# Altium PCB UM-1.PcbDoc
Units mm, origin at the board's own origin, x right, y up, seen from the top; angles counter-clockwise.
Board outline 22 x 12 mm, 4 copper layers (Top Layer, Layer 1, Layer 2, Bottom Layer), stack 0.793 mm thick; 23 components, 21 nets, 144 pads, 83 vias.
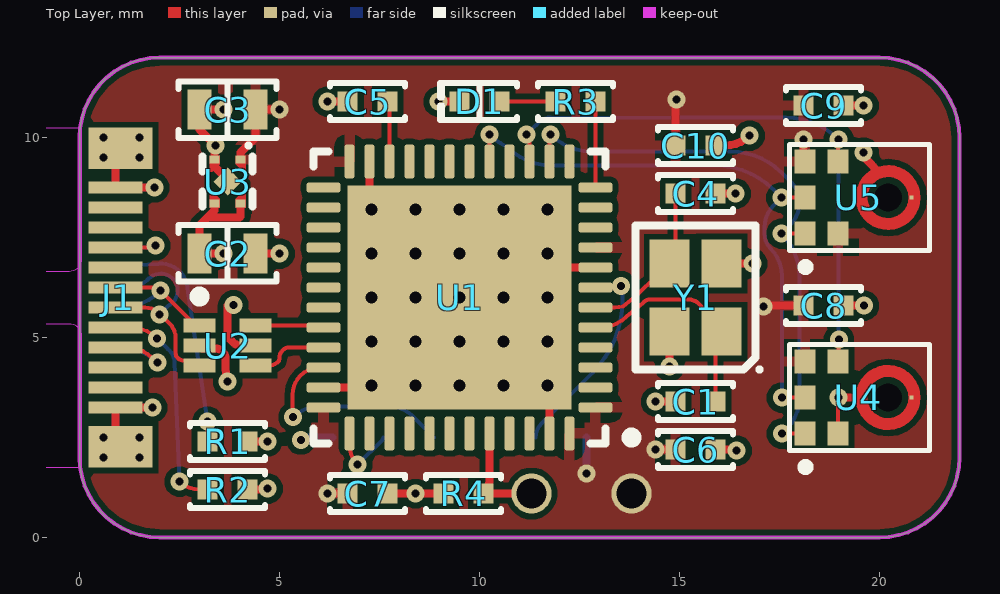
[diagram p0: Top Layer view]
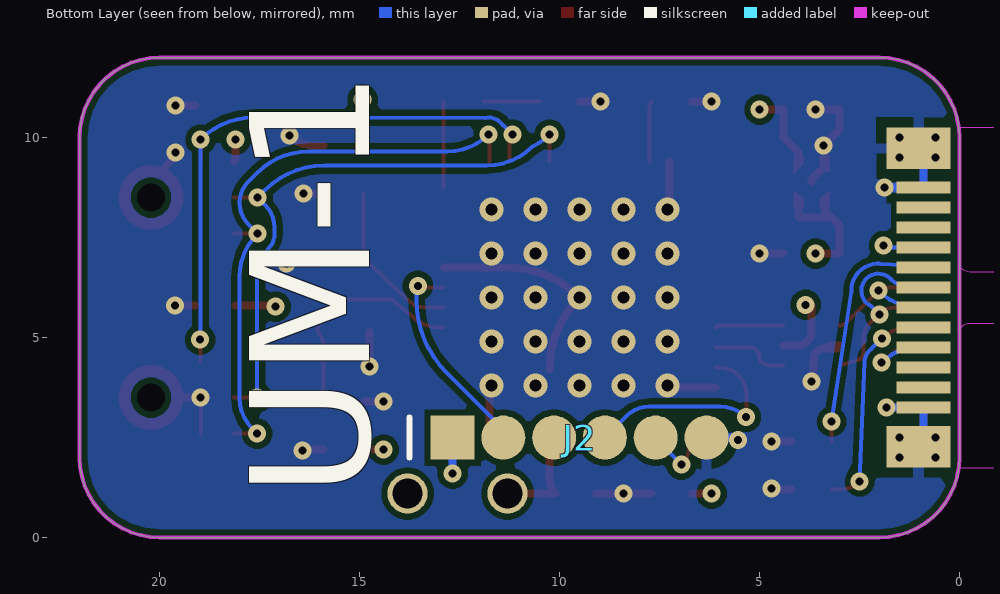
[diagram p1: Bottom Layer view, seen from below]
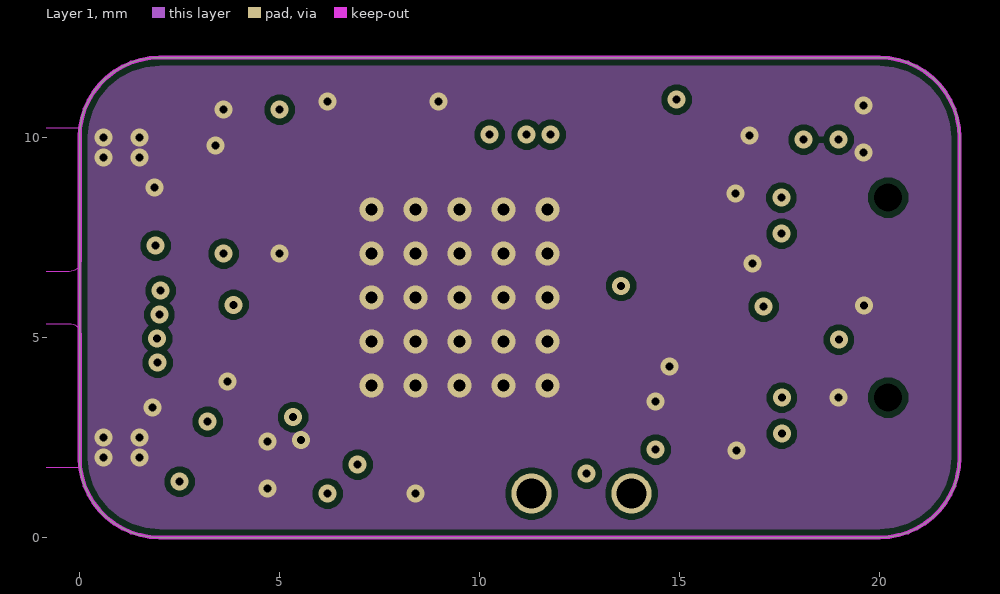
[diagram p2: Layer 1]
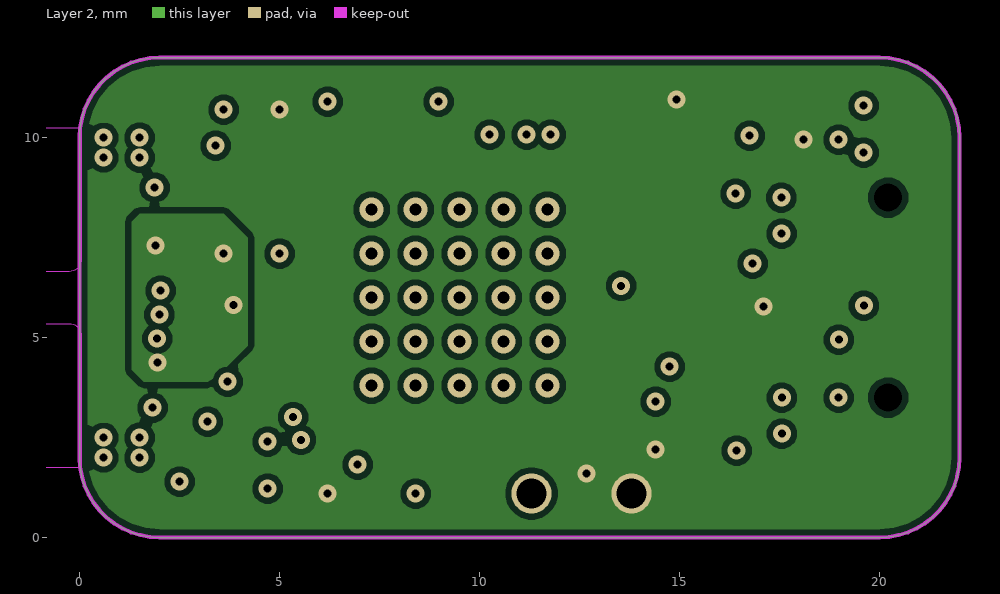
[diagram p3: Layer 2]

## Layer stack, top to bottom
Top Solder: solder mask 0.0102, Solder Resist, Dk 3.5
Top Layer: signal copper 0.0356
Dielectric 2: prepreg 0.0711, PP-006, Dk 4.1
Layer 1: signal copper 0.035
Dielectric 1: dielectric 0.51, FR-4, Dk 4.8
Layer 2: signal copper 0.035
Dielectric 3: prepreg 0.0711, PP-006, Dk 4.1
Bottom Layer: signal copper 0.0356
Bottom Solder: solder mask 0.0102, Solder Resist, Dk 3.5

## Board outline
2,0 20,0 ccw(c20,2) 22,2 22,10 ccw(c20,10) 20,12 2,12 ccw(c2,10) 0,10 0,2 ccw(c2,2)

## Design rules (kind name [scope] priority, off if disabled: settings)
Clearance [All] p1: gap=0.15 ignorepadtopadclearanceinfootprint=TRUE
MinimumSolderMaskSliver [All] p1 off: minsoldermaskwidth=0.1
PolygonConnect PolygonConnect_VIA [All vs IsVia] p1: connectstyle=Direct reliefconductorwidth=0.254 reliefentries=4 polygonreliefangle="90 Angle" airgapwidth=0.254
PolygonConnect [All] p2: connectstyle=Relief reliefconductorwidth=0.254 reliefentries=4 polygonreliefangle="90 Angle" airgapwidth=0.254
RoutingVias [All] p1: holewidth=0.3 width=0.6 viastyle="Through Hole" minholewidth=0.2 minwidth=0.45 maxholewidth=1 maxwidth=2
SilkToSilkClearance [All] p1 off: silktosilkclearance=0.254
SilkToSolderMaskClearance [IsPad] p1: minsilkscreentomaskgap=0.05 clearancetoexposedcopper=TRUE
SolderMaskExpansion [All] p1: expansion=0.05 istentingtop=FALSE
Width [All] p1: maxlimit=2 minlimit=0.1 preferedwidth=0.2
27 further rules are at their usual default settings.

## Components (designator, comment, footprint, x,y, rotation, side; value= is the part's Value field where it differs from the comment)
C1 "8pF" "CAP 0402/1005" 15.4,3.4 r0 top
C2 "10uF" "CAP 0603/1608" 3.7,7.1 r180 top
C3 "10uF" "CAP 0603/1608" 3.7,10.7 r0 top
C4 "8pF" "CAP 0402/1005" 15.4,8.6 r180 top
C5 "2.2uF" "CAP 0402/1005" 7.2,10.9 r0 top
C6 "100nF" "CAP 0402/1005" 15.4,2.2 r180 top
C7 "100nF" "CAP 0402/1005" 7.2,1.1 r180 top
C8 "100nF" "CAP 0402/1005" 18.6,5.8 r180 top
C9 "100nF" "CAP 0402/1005" 18.6,10.8 r180 top
C10 "100nF" "CAP 0402/1005" 15.4,9.8 r180 top
D1 "Green" "LED 0402/1005 GREEN" 10,10.9 r180 top
J1 "USB 3.1 Type C Plug" 632712000112 -4.75,6 r270 top
J2 "SWD Port" "DBG_6PX127 SMD" 9.5,2.5 r180 bottom
R1 "5.1K" "RES 0402/1005" 3.7,2.4 r180 top
R2 "5.1K" "RES 0402/1005" 3.7,1.2 r180 top
R3 "5.1K" "RES 0402/1005" 12.4,10.9 r180 top
R4 "10K" "RES 0402/1005" 9.6,1.1 r180 top
U1 "STM32F411CEU6" QFN50P700X700X60_HS-49N 9.5,6 r180 top
U2 "USBLC6-2P6" SOTFL50P160X60-6N 3.7,4.8 r0 top
U3 "LDLN025PU33R" XDFN65P100X45-4N 3.7,8.9 r180 top
U4 "ICS-43434" "TDK ICS-43434"#1 19.5,3.5 r90 top
U5 "ICS-43434" "TDK ICS-43434"#2 19.5,8.5 r90 top
Y1 "12MHz" "NDK NZ2520SD" 15.4,6 r90 top

## Footprints (in the part's own frame and the unit in brackets; to place one, negate y for a bottom-side part, rotate by r counter-clockwise, add the part's x,y. Pads: shape width x height; smd on the part's side, far side on the other; paste and mask are expansions set on the pad)
632712000112 [mm] "USB_ Type C 3.1 Plug_Horizontal_SMT_0,8mm"
  rect 0.3x1.35 smd: A1(2.75,5.65) A2(2.25,5.65) A3(1.75,5.65) A4(1.25,5.65) A5(0.75,5.65) A6(0.25,5.65) A7(-0.25,5.65) A8(-0.75,5.65) A9(-1.25,5.65) A10(-1.75,5.65) A11(-2.25,5.65) A12(-2.75,5.65)
  rect 0.3x1.35 smd far side: B1(-2.75,5.65) B2(-2.25,5.65) B3(-1.75,5.65) B4(-1.25,5.65) B5(-0.75,5.65) B6(-0.25,5.65) B7(0.25,5.65) B8(0.75,5.65) B9(1.25,5.65) B10(1.75,5.65) B11(2.25,5.65) B12(2.75,5.65)
  rect 1.04x1.6 smd: S(-3.73,5.775) S(3.73,5.775)
  rect 1.04x1.6 smd far side: S(-3.73,5.775) S(3.73,5.775)
  Keep-Out Layer board cut-out: 0.65,3.595 0.65,4.495 0.673,4.61 0.738,4.707 0.835,4.772 0.95,4.795 0.95,4.795 4.25,4.795 4.25,3.595
  Keep-Out Layer board cut-out: -4.25,3.595 -4.25,4.795 -0.95,4.795 -0.835,4.772 -0.738,4.707 -0.673,4.61 -0.65,4.495 -0.65,4.495 -0.65,3.595
  body extent -4.21,-5.83 4.22,6.17, height 1.51
"CAP 0402/1005" [mm] "Chip Capacitor, 2-Leads, Body 1.02x0.51mm, IPC Medium Density"
  rect 0.5x0.5 smd: 1(-0.5,0) 2(0.5,0)
  silkscreen extent -0.94,-0.46 0.94,0.46, body extent -0.5,-0.26 0.5,0.26, height 0.52
"CAP 0603/1608" [mm] "Chip Capacitor, 2-Leads, Body 1.60x0.80mm, IPC Medium Density"
  rect 0.6x1 smd: 1(-0.7,0) 2(0.7,0)
  silkscreen extent -1.22,-0.71 1.22,0.7, body extent -0.8,-0.41 0.8,0.41, height 0.82
"DBG_6PX127 SMD" [mm]
  rect 1.1x1.1 smd paste-2 mask+0: 1(-3.175,0)
  round 1.1 smd paste-2 mask+0: 2(-1.905,0) 3(-0.635,0) 4(0.635,0) 5(1.905,0) 6(3.175,0)
  silkscreen extent -4.25,-0.5 -4.25,0.5
"LED 0402/1005 GREEN" [mm] "Chip Diode, 2-Leads, Body 1.00x0.50mm, IPC Medium Density"
  rect 0.5x0.5 smd: 1(-0.5,0) 2(0.5,0)
  silkscreen extent -0.94,-0.46 0.99,0.46, body extent -0.5,-0.25 0.5,0.25, height 0.21
"NDK NZ2520SD" [mm] "Crystal, 4-Leads, Body 2.00x2.50mm, Pitch 1.70mm, IPC Medium Density"
  rect 1.2x1 smd: 1(-0.85,-0.65) 2(0.85,-0.65) 3(0.85,0.65) 4(-0.85,0.65)
  silkscreen extent -1.85,-1.65 1.8,1.5, body extent -1.27,-1.02 1.28,1.03, height 1
QFN50P700X700X60_HS-49N [mm] "QFN, 48-Leads, Body 7.00x7.00mm, Pitch 0.50mm, Thermal Pad 5.60x5.60mm, IPC Medium Density"
  rrect50% 0.85x0.25 smd mask+0.05: 1(-3.4,2.75) 2(-3.4,2.25) 3(-3.4,1.75) 4(-3.4,1.25) 5(-3.4,0.75) 6(-3.4,0.25) 7(-3.4,-0.25) 8(-3.4,-0.75) 9(-3.4,-1.25) 10(-3.4,-1.75) 11(-3.4,-2.25) 12(-3.4,-2.75) 25(3.4,-2.75) 26(3.4,-2.25) 27(3.4,-1.75) 28(3.4,-1.25) 29(3.4,-0.75) 30(3.4,-0.25) 31(3.4,0.25) 32(3.4,0.75) 33(3.4,1.25) 34(3.4,1.75) 35(3.4,2.25) 36(3.4,2.75)
  rrect50% 0.25x0.85 smd mask+0.05: 13(-2.75,-3.4) 14(-2.25,-3.4) 15(-1.75,-3.4) 16(-1.25,-3.4) 17(-0.75,-3.4) 18(-0.25,-3.4) 19(0.25,-3.4) 20(0.75,-3.4) 21(1.25,-3.4) 22(1.75,-3.4) 23(2.25,-3.4) 24(2.75,-3.4) 37(2.75,3.4) 38(2.25,3.4) 39(1.75,3.4) 40(1.25,3.4) 41(0.75,3.4) 42(0.25,3.4) 43(-0.25,3.4) 44(-0.75,3.4) 45(-1.25,3.4) 46(-1.75,3.4) 47(-2.25,3.4) 48(-2.75,3.4)
  rect 5.6x5.6 smd mask+0.05: 49(0,0)
  silkscreen extent -4.43,-3.65 3.65,3.65, body extent -3.52,-3.52 3.52,3.52, height 0.6
"RES 0402/1005" [mm] "Chip Resistor, 2-Leads, Body 1.0x0.5mm, IPC Medium Density"
  rect 0.5x0.5 smd: 1(-0.5,0) 2(0.5,0)
  silkscreen extent -0.94,-0.46 0.94,0.46, body extent -0.5,-0.25 0.5,0.25, height 0.35
SOTFL50P160X60-6N [mm] "SOTFL, 6-Leads, Body 1.60x1.60mm, Pitch 0.50mm, IPC Medium Density"
  rect 0.8x0.35 smd: 1(-0.7,0.5) 2(-0.7,0) 3(-0.7,-0.5) 4(0.7,-0.5) 5(0.7,0) 6(0.7,0.5)
  silkscreen extent -0.82,1.1 -0.57,1.35, body extent -0.8,-0.85 0.8,0.85, height 0.6
"TDK ICS-43434"#1 [mm] "MEMS Microphone"
  rect 0.6x0.522 smd paste-0.05: 1(-0.9,1.361) 2(-0.9,0.539) 4(0.9,0.539) 5(0.9,1.361) 6(0,1.361)
  rect 0.1x0.1 smd paste-1 mask+0: 3(0,-1.3)
  round 0.5 hole 0.7 unplated mask+0.665: ""(0,-0.713)
  Top Layer circle w0.3: c0,-0.713 r0.663
  silkscreen extent -1.84,-1.75 1.33,1.75, body extent -1.33,-1.75 1.33,1.75, height 0.98
"TDK ICS-43434"#2 [mm] "MEMS Microphone"
  rect 0.6x0.522 smd paste-0.05: 1(-0.9,1.361) 2(-0.9,0.539) 4(0.9,0.539) 5(0.9,1.361) 6(0,1.361)
  rect 0.1x0.1 smd paste-1 mask+0: 3(0,-1.3)
  round 0.5 hole 0.7 unplated mask+0.665: ""(0,-0.713)
  Top Layer lines w0.3: 0.55,-0.344 ccw(c0,-0.713) 0,-1.376 ccw(c0,-0.713) 0.587,-0.406 ccw(c0,-0.713) 0.55,-0.344
  silkscreen extent -1.84,-1.75 1.33,1.75, body extent -1.33,-1.75 1.33,1.75, height 0.98
XDFN65P100X45-4N [mm] "XDFN, 4-Leads, Body 1.00x1.00mm, Pitch 0.65mm, IPC Medium Density"
  rect 0.25x0.2 smd mask+0: 1(-0.325,-0.55) 2(0.325,-0.55) 3(0.325,0.55) 4(-0.325,0.55)
  rect 0.5x0.5 smd rot 45 mask+0.05: 5(0,0)
  Top Layer region: -0.45,0.65 -0.45,0.25 -0.38,0.25 -0.2,0.43 -0.2,0.65
  Top Layer region: 0.45,0.65 0.45,0.25 0.38,0.25 0.2,0.43 0.2,0.65
  Top Layer region: 0.45,-0.65 0.45,-0.25 0.38,-0.25 0.2,-0.43 0.2,-0.65
  Top Layer region: -0.45,-0.65 -0.45,-0.18 -0.2,-0.43 -0.2,-0.65
  silkscreen extent -0.63,-0.95 0.63,0.63, body extent -0.5,-0.5 0.5,0.5, height 0.45

## Part data
C1 C4: library part CM0143, "CAP CER 8PF 50V NP0 0402", Device Package="0402 (1005 Metric)", Manufacturer=Murata, Part Number=GRM1555C1H8R0BA01D, Supplier Part Number 1=490-8230-2-ND, TemperatureCoefficient="C0G, NP0", TemperatureRange="-55C ~ 125C", Tolerance=0.1pF, Voltage=50V, ComponentLink1Description=Datasheet, ComponentLink1URL=http://www.murata.com/~/media/webrenewal/support/library/catalog/products/capacitor/mlcc/c02e.ashx, ComponentLink2Description="Digi-Key listing", ComponentLink2URL=http://digikey.com/product-detail/en/GRM1555C1H8R0BA01D/490-8230-2-ND/3694033, PartId=CM0143, Price=0.0108, Supplier 1=Digi-Key, Type=-
C2 C3: library part CM0905, "CAP CER 10UF 25V X5R 0603", Device Package="0603 (1608 Metric)", Manufacturer=Murata, Part Number=GRM188R61E106MA73D, Supplier Part Number 1=490-7202-2-ND, TemperatureCoefficient=X5R, TemperatureRange="-55C ~ 85C", Tolerance=20%, Voltage=25V, ComponentLink1Description=Datasheet, ComponentLink1URL=http://www.murata.com/~/media/webrenewal/support/library/catalog/products/capacitor/mlcc/c02e.pdf, ComponentLink2Description="Digi-Key Listing", ComponentLink2URL=https://www.digikey.com/product-detail/en/murata-electronics-north-america/GRM188R61E106MA73D/490-7202-2-ND/3900497, PartId=CM0905, Price=0.0858, Supplier 1=Digi-Key
C5: library part CM0503, "CAP CER 2.2UF 10V X5R 0402", Device Package="0402 (1005 Metric)", Manufacturer="Murata Electronics North America", Part Number=GRM155R61A225ME95D, Supplier Part Number 1=490-10452-2-ND, TemperatureCoefficient=X5R, TemperatureRange="-55C ~ 85C", Tolerance=20%, Voltage=10V, ComponentLink1Description=Datasheet, ComponentLink1URL=http://www.murata.com/~/media/webrenewal/support/library/catalog/products/capacitor/mlcc/c02e.pdf, ComponentLink2Description="Digi-Key Listing", ComponentLink2URL=https://www.digikey.com/product-detail/en/murata-electronics-north-america/GRM155R61A225ME95D/490-10452-2-ND/5027537, PartId=CM0503, Price=0.0151, Supplier 1=Digi-Key, va=2200000
C6 C7 C8 C9 C10: library part CM0464, "CAP CER 100NF 25V X5R 0402", Device Package="0402 (1005 Metric)", Manufacturer=Murata, Part Number=GRM155R61E104KA87D, Supplier Part Number 1=490-5920-2-ND, TemperatureCoefficient=X5R, TemperatureRange="-55C ~ 85C", Tolerance=10%, Voltage=25V, ComponentLink1Description=Datasheet, ComponentLink1URL=http://www.murata.com/~/media/webrenewal/support/library/catalog/products/capacitor/mlcc/c02e.pdf, ComponentLink2Description="Digi-Key Listing", ComponentLink2URL=https://www.digikey.com/product-detail/en/murata-electronics-north-america/GRM155R61E104KA87D/490-5920-2-ND/3693681, PartId=CM0464, Price=0.0048, Supplier 1=Digi-Key
D1: library part LS0063, "LED GREEN DIFFUSED 0402 SMD", Current (Test)=20mA, Device Package="0402 (1005 Metric)", Manufacturer="Avago Technologies US Inc.", Part Number=HSMG-C280, Supplier Part Number 1=516-3066-2-ND, Voltage Forward=2.2V, Colour=Green, ComponentLink1Description=Datasheet, ComponentLink1URL=http://www.avagotech.com/docs/AV02-0602EN, ComponentLink2Description="Digi-Key Listing", ComponentLink2URL=http://www.digikey.ca/product-detail/en/HSMG-C280/516-3066-2-ND/1235358, Lens Transparency=Diffused, Millicandela=15mcd, PartId=LS0063, Price=0.1147, Supplier 1=Digi-Key, Type="Surface Mount", Viewing Angle=130
J1: library part CU0054, "USB 3.1 Type C, Plug, Horizontal, SMT", Manufacturer=Wurth, Part Number=632712000112, Supplier Part Number 1=710-632712000112, ComponentLink1Description=Datasheet, ComponentLink1URL=https://katalog.we-online.com/em/datasheet/632712000112.pdf, Number Of Positions=24, PartId=CU0054, Supplier 1=Mouser, Type="USB - C"
J2: "6 Pin SWD Connector", Component Type="Standard (No BOM)", Part Number="SWD Port", Pin Count=6
R1 R2 R3: library part RC1489, "RES SMD 5.1K OHM 5% 1/16W 0402", Device Package="0402 (1005 Metric)", Manufacturer=Yageo, Part Number=RC0402JR-075K1L, PowerRating="0.0625W, 1/16W", Supplier Part Number 1=603-RC0402JR-075K1L, TemperatureCoefficient=100ppm/C, TemperatureRange="-55C ~ 155C", Tolerance=5%, ComponentLink1Description=Datasheet, ComponentLink1URL=http://www.yageo.com/NewPortal/yageodocoutput?fileName=/pdf/R-Chip/PYu-RC_Group_51_RoHS_L_9.pdf, PartId=RC1489, Price=0.0043, Supplier 1=Mouser, Type="Thick Film"
R4: library part RC1530, "RES SMD 10K OHM 5% 1/16W 0402", Device Package="0402 (1005 Metric)", Manufacturer=Yageo, Part Number=RC0402JR-0710KL, PowerRating="0.0625W, 1/16W", Supplier Part Number 1=603-RC0402JR-0710KL, TemperatureCoefficient=100ppm/C, TemperatureRange="-55C ~ 155C", Tolerance=5%, ComponentLink1Description=Datasheet, ComponentLink1URL=http://www.yageo.com/NewPortal/yageodocoutput?fileName=/pdf/R-Chip/PYu-RC_Group_51_RoHS_L_9.pdf, PartId=RC1530, Price=0.0043, Supplier 1=Mouser, Type="Thick Film"
U1: library part US3028, "32-bit MCU, 512KB Flash, 128KB RAM, USB", Device Package="48-QFN (7x7)", Manufacturer=ST, Operating Temperature="-40C ~ 85C", Supplier Part Number 1="497-14907-ND / 497-14907-ND / 497-14907-ND", ComponentLink1Description=Datasheet, ComponentLink1URL=https://www.st.com/resource/en/datasheet/stm32f411ce.pdf, Part Number=STM32F411CEU6, PartId=US3028, Price=4, Supplier 1=Digi-Key, Supplier 2=Mouser, Supplier Part Number 2=511-STM32F411CEU6, Type=MCU
U2: library part IIF001, "TVS ARRAY SOT666", Device Package=SOTFL-6, Manufacturer=ST, Operating Temperature="-40C ~ 125C", Supplier Part Number 1=497-5026-1-ND, ComponentLink1Description=Datasheet, ComponentLink1URL=http://www.st.com/resource/en/datasheet/usblc6-2.pdf, Part Number=USBLC6-2P6, PartId=IIF001, Price=0.58, Supplier 1=Digi-Key, Supplier 2=Farnell, Supplier Part Number 2=1295310, Type="ESD Diode"
U3: library part URL069, "3.3V 250mA Ultra Low Noise LDO", Device Package=4-XDFN, Input Voltage MAX=5.5V, Manufacturer=ST, Operating Temperature="-40C ~ 125C", Output Current=250mA, Output Voltage=3.3V, Supplier Part Number 1=497-17003-2-ND, Alt Part=NCP161BMX330TBG, ComponentLink1Description=Datasheet, ComponentLink1URL=http://www.st.com/resource/en/datasheet/ldln025.pdf, Part Number=LDLN025PU33R, PartId=URL069, Price=0.2295, Supplier 1=Digi-Key, Supplier 2=Mouser, Supplier Part Number 2=511-LDLN025PU33R, Type=LDO
U4 U5: library part UA0012, "MICROPHONE MEMS DIGITAL I2S OMNI", Manufacturer=TDK, Operating Temperature="-40C ~ 85C", Package=None, Supplier Part Number 1=1428-1066-2-ND, Availability=Unavailable, ComponentLink1Description=Datasheet, ComponentLink1URL=https://invensense.tdk.com/wp-content/uploads/2016/02/DS-000069-ICS-43434-v1.2.pdf, MP=ICS-43434, Part Number=ICS-43434, PartId=UA0012, Price=2, Supplier 1=Digi-Key, Supplier 2=Mouser, Supplier Part Number 2=410-ICS-43434, Type="MEMS MIC"
Y1: library part OC0706, "CRYSTAL 12MHZ 12PF SMD", Device Package="4-SMD, No Lead (DFN, LCC", Frequency Stability=-, Frequency Tolerance=10ppm, Load Capacitance=12pF, Manufacturer=ECS, Part Number=ECS-120-12-36Q-CWY-TR, Supplier Part Number 1=XC2419CT-ND, ComponentLink1Description=Datasheet, ComponentLink1URL=https://ecsxtal.com/store/pdf/ECX-2236Q.pdf, Frequency=12MHz, PartId=OC0706, Series=ECX-2236Q, Supplier 1=Digi-Key, Supplier 2=Mouser, Supplier Part Number 2=520-120-12-36Q-CWYT, Type="MHz Crystal"

## Free pads (board coordinates)
  round 1 hole 0.75: P2(11.3,1.1) P3(13.8,1.1)

## Via types
v1: diameter 0.45, hole 0.2, Top Layer to Bottom Layer, tented both sides, 58 vias
v2: diameter 0.6, hole 0.3, Top Layer to Bottom Layer, 25 vias

## Nets (pads, with @x,y where several pads share a name; then routed paths per layer and width w, separated by ;. In a path a pad name is that pad's centre, name@x,y a point inside that pad or via, vN(x,y) a via of type N, cw(c..) or ccw(c..) an arc to the next point about the centre after c; other vN are vias at no path point)
3.3V: C3.2 C6.2 C7.2 C8.2 C9.2 C10.2 J2.1 pad.P3 U1.1 U1.9 U1.24 U1.36 U1.48 U3.1 U4.5 U5.2 U5.5 | length 6.6
  Top Layer w0.2: U3.1 4.025,9.625 4.4,10 C3.2 v1(5,10.7) ; v1(6.2,1.1) C7.2 ; v1(14.4,2.2) C6.2 ; C10.2 14.9,10.89 cw(c14.985,10.89) v1(14.925,10.95) ; v1(17.1,5.775) cw(c17.16,5.715) 17.16,5.8 C8.2 ; v1(18.1,9.95) 18.1,9.494 ccw(c18.233,9.494) U5.5
  Bottom Layer w0.2: v1(12.675,1.6) J2.1
5V: C2.2 J1.A4 J1.A9 J1.B4 J1.B9 U2.5 U3.3 U3.4 | length 9.9
  Top Layer w0.1: J1.A4 J1.A4@1.197,4.75 ; J1.A9 1.779,7.25 ccw(c1.779,7.421) v1(1.9,7.3) v1@1.8,7.4 ; J1.A4@1.357,4.75 J1.A4@1.197,4.75 ; v1(1.951,4.374) 1.951,4.4 1.85,4.5 1.8,4.5 ccw(c1.197,3.897) J1.A4@1.197,4.75
  Top Layer w0.2: U3.3 3.375,8.175 3.2,8 ; v1(3.6,7.1) C2.2 3,7.8 3.2,8 ; v1(3.85,5.819) 3.831,5.8 3.7,5.8 3.7,5.141 ccw(c4.041,5.141) 3.751,4.962 cw(c3.4,4.475) 3.873,4.845 ccw(c4.041,5.141) 4.041,4.8 U2.5 ; U3.4 4.025,8.025 4,8 3.2,8
  Bottom Layer w0.1: J1.B9 J1.B9@1.042,4.75 ; J1.B4 1.78,7.25 ccw(c1.78,7.42) v1(1.9,7.3) v1@1.825,7.375 ; v1@1.858,4.4 v1@1.924,4.4 ; v1@1.951,4.4 v1(1.951,4.374) ccw(c1.042,3.466) v1@1.924,4.4 ; v1@1.95,4.4 v1@1.924,4.4 ; J1.B9@1.042,4.75 cw(c1.042,3.466) J1.B9@1.204,4.74 ; J1.B9@1.042,4.75 1.204,4.75 J1.B9@1.204,4.74 ; J1.B9@1.204,4.74 cw(c1.042,3.466) 1.645,4.6 cw(c1.042,3.466) 1.674,4.584 cw(c1.042,3.466) v1@1.924,4.4
BOOT: pad.P2 R4.1 U1.44 | length 2.7
  Top Layer w0.2: U1.44 10.25,1.462 cw(c9.738,1.462) R4.1 pad.P2
DATA: U1.17 U4.6 U5.6 | length 14.9
  Top Layer w0.1: U1.17 v1(10.25,10.075) ; v1(17.548,8.499) 17.55,8.5 U5.6 ; v1(17.561,3.5) U4.6@18.15,3.5
  Bottom Layer w0.1: v1(10.25,10.075) ccw(c11.336,11.161) 10.676,9.774 ccw(c11.822,10.922) 11.822,9.3 15.875,9.3 cw(c15.875,7.194) 17.364,8.683 v1(17.548,8.499) 17.355,8.305 ccw(c17.91,7.75) 17.125,7.75 17.125,7.587 ccw(c17.637,7.587) 17.275,7.225 cw(c16.585,6.535) 17.561,6.535 v1(17.561,3.5)
DN1: J1.A7 J1.B7 U2.1 | length 3.8
  Top Layer w0.1: J1.A7 1.95,6.25 v1(2.029,6.171) 2.282,5.918 cw(c2,5.6) 2.318,5.882 2.829,5.371 ccw(c3,5.542) U2.1
  Bottom Layer w0.1: J1.B7 1.015,5.75 ccw(c1.015,7.185) v1(2.029,6.171) 2,6.2 v1@1.961,6.2
DN2: U1.32 U2.6 | length 1.7
  Top Layer w0.1: U2.6 5.979,5.3 cw(c5.979,5.129) U1.32
DP1: J1.A6 J1.B6 U2.3 | length 5.7
  Top Layer w0.1: J1.A6 1.638,5.75 cw(c1.638,5.238) 2,5.6 v1@2.014,5.586 ; v1(1.999,5.571) v1@2.014,5.586 ; U2.3 2.569,4.427 cw(c2.6,4.625) 2.407,4.574 cw(c2.6,4.625) 2.4,4.625 2.4,4.634 cw(c2.741,4.641) 2.4,4.641 2.4,5 ccw(c1.917,5) 2.259,5.341 v1@2.014,5.586
  Bottom Layer w0.1: J1.B6 1.196,6.25 ccw(c1.196,7.002) 1.704,6.447 ccw(c1.575,6.6) 1.718,6.46 cw(c2.029,6.171) 1.728,6.47 cw(c2.029,6.171) 1.73,6.472 cw(c2.029,6.171) 1.84,6.551 cw(c2.029,6.171) 2.119,6.586 cw(c2.029,6.171) 2.43,6.313 cw(c2.029,6.171) 2.453,6.141 cw(c2.029,6.171) 2.217,5.789 ccw(c2.5,5.483) 2.205,5.778 v1(1.999,5.571)
DP2: U1.33 U2.4 | length 1.9
  Top Layer w0.1: U2.4 4.722,4.3 ccw(c4.722,4.667) 4.982,4.408 ccw(c4.759,4.5) 5,4.5 cw(c5.241,4.5) 5.071,4.671 5.1,4.7 cw(c5.221,4.579) 5.221,4.75 U1.33
GND: C1.1 C2.1 C3.1 C4.1 C5.1 C6.1 C7.1 C8.1 C9.1 C10.1 D1.2 J1.A1 J1.A12 J1.B1 J1.B12 J1.S J2.6 R1.1 R2.1 R4.2 U1.8 U1.23 U1.35 U1.47 U1.49 U2.2 U3.2 U3.5 U4.2 U4.3 U5.3 Y1.2 Y1.4 | length 33.8
  Top Layer w0.1: U4.2 18.961,3.486 v1(18.975,3.5)
  Top Layer w0.2: J1.S@1.025,2.27 cw(c1.326,2.571) 0.9,2.571 J1.A1 v1(1.825,3.25) ; J1.S@1.025,9.73 ccw(c1.326,9.429) 0.9,9.429 J1.A12 v1(1.875,8.75) ; v1(3.6,10.7) C3.1 3,10.2 v1(3.4,9.8) 3.375,9.775 U3.2 3.375,9.275 3.7,8.95 U3.5 ; v1@3.7,4 v1(3.7,3.9) 3.65,4.2 3.65,4.475 ccw(c3.4,4.475) 3.4,4.725 U2.2@3.372,4.725 ; R2.1 4.675,1.2 v1(4.7,1.225) ; R1.1 v1(4.7,2.4) ; C2.1 v1(5,7.1) ; U1.35 7.179,3.75 ccw(c7.179,3.921) v2(7.3,3.8) ; v1(6.2,10.9) C5.1 ; U1.23 7.25,8.321 ccw(c7.421,8.321) v2(7.3,8.2) ; C7.1 v1(8.4,1.1) R4.2 ; v1(8.975,10.9) D1.2 ; U1.49@10.25,4.198 ccw(c7.71,4.198) 9.506,5.994 v2(9.5,6) 9.506,6.006 cw(c11.302,4.21) 11.302,6.75 U1.8 ; v2(11.7,3.8) cw(c11.579,3.679) 11.75,3.679 U1.47 ; v1(14.4,3.4) C1.1 ; v1(14.75,4.275) Y1.4 ; C6.1 16.4,2.2 v1(16.425,2.175) ; C4.1 v1(16.4,8.6) ; C10.1 16.146,9.8 ccw(c16.146,10.654) v1(16.75,10.05) ; Y1.2 v1(16.825,6.85) ; v1(18.975,3.5) 19.5,3.5 ; C9.1 v1(19.6,10.8) ; C8.1@19.111,5.8 v1(19.611,5.8) ; v1(19.6,9.625) 19.6,9.525 19.812,9.313 cw(c19.586,9.087) 19.906,9.087 ; U2.2@3.372,4.725 ccw(c3.158,4.458) 3.158,4.8 U2.2 3.075,4.725 U2.2@3.372,4.725
  Top Layer w0.3: 19.798,9.004 19.844,9.05 19.85,9.056
  Bottom Layer w0.2: J1.S@1.025,2.27 cw(c1.326,2.571) 0.9,2.571 J1.B12 v1(1.825,3.25) ; J1.S@1.025,9.73 ccw(c1.326,9.429) 0.9,9.429 J1.B1 v1@1.875,8.75 ; v1(5.537,2.441) 5.525,2.475 cw(c5.585,2.415) 5.585,2.5 J2.6
  other v1: 0.6,2 1.5,2 0.6,2.5 1.5,2.5 0.6,9.5 1.5,9.5 0.6,10 1.5,10
  other v2: 8.4,3.8 9.5,3.8 10.6,3.8 7.3,4.9 8.4,4.9 9.5,4.9 10.6,4.9 11.7,4.9 7.3,6 8.4,6 10.6,6 11.7,6 7.3,7.1 8.4,7.1 9.5,7.1 10.6,7.1 11.7,7.1 8.4,8.2 9.5,8.2 10.6,8.2 11.7,8.2
LRCK: U1.14 U4.1 U5.1 | length 15
  Top Layer w0.1: U1.14 11.75,10.015 cw(c11.835,10.015) v1(11.775,10.075) ; v1(17.55,7.6) U5.1 ; v1(17.561,2.6) U4.1@18.15,2.6
  Bottom Layer w0.1: v1(11.775,10.075) ccw(c12.801,11.101) 12.801,9.65 16.275,9.65 cw(c16.275,7.839) 17.555,9.12 17.788,8.887 cw(c17.276,8.375) 18,8.375 cw(c17.215,8.375) 17.77,7.82 v1(17.55,7.6) cw(c16.464,6.514) 18,6.514 18,3.5 cw(c16.887,3.5) v1@17.674,2.713 ; v1(17.561,2.6) v1@17.674,2.713
NetC1_2: C1.2 U1.5 Y1.1 | length 5.5
  Top Layer w0.1: U1.5 13.011,5.25 ccw(c13.011,6.189) 13.675,5.525 14.086,5.864 cw(c14.25,5.75) 14.161,5.929 cw(c14.25,5.75) 14.25,5.95 15.25,5.95 cw(c15.25,5.75) 15.349,5.924 cw(c15.329,5.754) 15.45,5.875 15.962,5.363 cw(c15.748,5.15) Y1.1 ccw(c16.412,4.788) 15.9,4.788 C1.2
NetC4_2: C4.2 U1.6 Y1.3 | length 4.1
  Top Layer w0.1: U1.6 13.371,5.75 ccw(c13.371,6.604) 13.589,5.778 13.905,6.039 cw(c14.25,5.75) 13.972,6.104 13.982,6.114 ; 13.983,6.114 Y1.3 14.9,7 C4.2
NetC5_2: C5.2 U1.22 | length 1.5
  Top Layer w0.1: C5.2 cw(c7.579,10.779) 7.75,10.779 U1.22
NetD1_1: D1.1 R3.2 | length 1.4
  Top Layer w0.1: D1.1 R3.2
NetJ1_A5: J1.A5 R2.2 | length 5.6
  Top Layer w0.1: J1.A5 1.277,5.25 cw(c1.277,4.308) 1.916,5 cw(c1.277,4.308) v1(1.943,4.974) ; v1(2.5,1.4) ccw(c2.983,1.883) 2.983,1.2 R2.2
  Bottom Layer w0.1: v1(1.943,4.974) 2.196,4.721 cw(c1.951,4.374) 2.376,4.378 v1(2.5,1.4)
NetJ1_B5: J1.B5 R1.2 | length 6
  Top Layer w0.1: R1.2 v1(3.2,2.9)
  Bottom Layer w0.1: J1.B5 0.933,6.787 1.973,6.843 cw(c2.029,6.171) 2.062,6.845 cw(c2.032,6.17) 2.707,6.139 v1(3.2,2.9)
NetJ2_2: J2.2 U1.7 | length 5.3
  Top Layer w0.1: U1.7 13.542,6.25 v1(13.542,6.29)
  Bottom Layer w0.1: J2.2 cw(c11.9,2.5) 11.55,2.85 12.831,4.131 ccw(c11.035,5.927) 13.575,5.927 13.575,6.25 v1(13.542,6.29)
NetJ2_4: J2.4 U1.34 | length 5.6
  Top Layer w0.1: v1(5.339,3.008) 5.315,3.072 5.321,3.074 5.325,3.075 5.325,3.567 cw(c6.008,3.567) 5.525,4.05 cw(c6.008,3.567) 6.008,4.25 U1.34
  Bottom Layer w0.1: v1(5.339,3.008) cw(c5.984,2.363) 5.984,3.275 7.75,3.275 cw(c7.75,2.454) 8.33,3.035 J2.4
NetJ2_5: J2.5 U1.37 | length 1.8
  Top Layer w0.1: U1.37 6.75,2.308 ccw(c7.433,2.308) 6.95,1.825 v1(6.953,1.821)
  Bottom Layer w0.1: v1(6.953,1.821) 7.569,2.437 ccw(c7.505,2.5) J2.5
NetR3_1: R3.1 U1.12 | length 2.2
  Top Layer w0.1: U1.12 R3.1
SCLK: U1.15 U4.4 U5.4 | length 14.9
  Top Layer w0.1: v1(11.175,10.075) 11.2,10.075 cw(c11.079,9.954) 11.25,9.954 U1.15 ; U5.4 18.961,9.916 cw(c19.009,9.916) v1(18.975,9.95) ; U4.4@18.972,4.4 18.972,4.916 cw(c19.02,4.916) v1(18.986,4.95)
  Bottom Layer w0.1: v1(11.175,10.075) 11.353,10.253 cw(c11.95,9.655) 11.427,10.318 cw(c11.775,10.075) 11.848,10.494 14.9,10.5 17.647,10.5 cw(c17.647,8.622) v1(18.975,9.95) 18.975,4.977 ccw(c19.013,4.977) v1(18.986,4.95)
pads on no net: J1.A2 J1.A3 J1.A8 J1.A10 J1.A11 J1.B2 J1.B3 J1.B8 J1.B10 J1.B11 J2.3 U1.2 U1.3 U1.4 U1.10 U1.11 U1.13 U1.16 U1.18 U1.19 U1.20 U1.21 U1.25 U1.26 U1.27 U1.28 U1.29 U1.30 U1.31 U1.38 U1.39 U1.40 U1.41 U1.42 U1.43 U1.45 U1.46 U4. U5.

## Polygon pours and split planes (outlines as drawn)
GND on Layer 1 "GND_L02_P000" (solid, pour order 0): 0,0 22,0 22,12 0,12
3.3V on Layer 2 "3.3V_L03_P002" (solid, pour order 2): 0,0 22,0 22,12 0,12
5V on Layer 2 "5V_L03_P001" (solid, pour order 1): 4.2,7.5 3.6,8.1 1.5,8.1 1.3,7.9 1.3,4.2 1.6,3.9 3.1,3.9 3.3,3.9 4.2,4.8
GND on Bottom Layer "GND_L04_P004" (solid, pour order 4): 0,0 22,0 22,12 0,12
3.3V on Top Layer "3.3V_L01_P003" (solid, pour order 3): 0,0 22,0 22,12 0,12

## Keep-outs
Keep-Out Layer:
  the board outline again, w0.1

## Silkscreen, mask and mechanical layers (free items; w line width, h text height)
Bottom Overlay:
  text "UM-1" at 14.754,1.002 h3 r270
Mechanical 1:
  the board outline again, w0.1
Board:
  lines w0.127: -119.925,-36.665 -114.845,-36.665 ; -119.925,11.595 -114.845,11.595 ; -119.925,59.855 -114.845,59.855 ; -46.9,-84.925 -46.9,-79.845 ; -46.9,103.035 -46.9,108.115 ; 26.125,-84.925 26.125,-79.845 ; 26.125,103.035 26.125,108.115 ; 52.795,-72.225 167.095,-72.225 ; 52.795,-64.605 167.095,-64.605 ; 52.795,-56.985 90.895,-56.985 ; 90.895,-79.845 90.895,-64.605 90.895,-49.365 ; 99.15,-84.925 99.15,-79.845 ; 99.15,103.035 99.15,108.115 ; 144.235,-79.845 144.235,-64.605 ; 167.095,-36.665 172.175,-36.665 ; 167.095,11.595 172.175,11.595 ; 167.095,59.855 172.175,59.855 ; 90.895,-49.365 52.795,-49.365 52.795,-79.845 167.095,-79.845 ; 90.895,-49.365 167.095,-49.365 167.095,-79.845 ; 167.095,-79.845 -114.845,-79.845 -114.845,103.035 167.095,103.035 167.095,-79.845 ; -119.925,-84.925 172.175,-84.925 172.175,108.115 -119.925,108.115 -119.925,-84.925
  text "1" at -83.679,104.686 h1.78
  text "2" at -11.035,104.686 h1.78
  text "3" at 62.117,104.686 h1.78
  text "4" at 135.015,104.686 h1.78
  text "A" at -118.02,81.674 h1.78
  text "A" at 169,81.674 h1.78
  text "B" at -118.02,33.617 h1.78
  text "B" at 169,33.617 h1.78
  text "C" at -118.02,-14.897 h1.78
  text "C" at 169,-14.897 h1.78
  text "AUTHOR:" at 54.065,-51.905 h1.14
  text "TITLE:" at 92.165,-51.905 h1.14
  text "LAYER:" at 54.065,-59.398 h1.14
  text "D" at -118.02,-62.903 h1.78
  text "D" at 169,-62.903 h1.78
  text "DATE:" at 54.065,-67.145 h1.14
  text "PART NO.:" at 92.165,-67.145 h1.14
  text "REV:" at 145.505,-67.145 h1.14
  text ".PRINT_DATE" at 55.335,-70.193 h1.78
  text "FILE NAME:" at 54.065,-74.765 h1.14
  text "DWG NO:" at 92.165,-74.765 h1.14
  text "SCALE:" at 145.505,-74.765 h1.14
  text ".PCB_FILE_NAME_NO_PATH" at 55.335,-77.813 h1.78
  text "1" at -83.679,-83.274 h1.78
  text "2" at -11.035,-83.274 h1.78
  text "3" at 62.117,-83.274 h1.78
  text "4" at 135.015,-83.274 h1.78

## Text inside footprints (layer, text, board x,y; h text height)
J1: Mechanical 2 "PCB End" at -2.055,6 h1.02 r270